# Altium PCB Methane Sensor PCB.PcbDoc
Units mil, origin at the board's own origin, x right, y up, seen from the top; angles counter-clockwise.
Board outline 2570 x 1825 mil, 2 copper layers (Top Layer, Bottom Layer); 14 components, 11 nets, 65 pads, 7 vias.
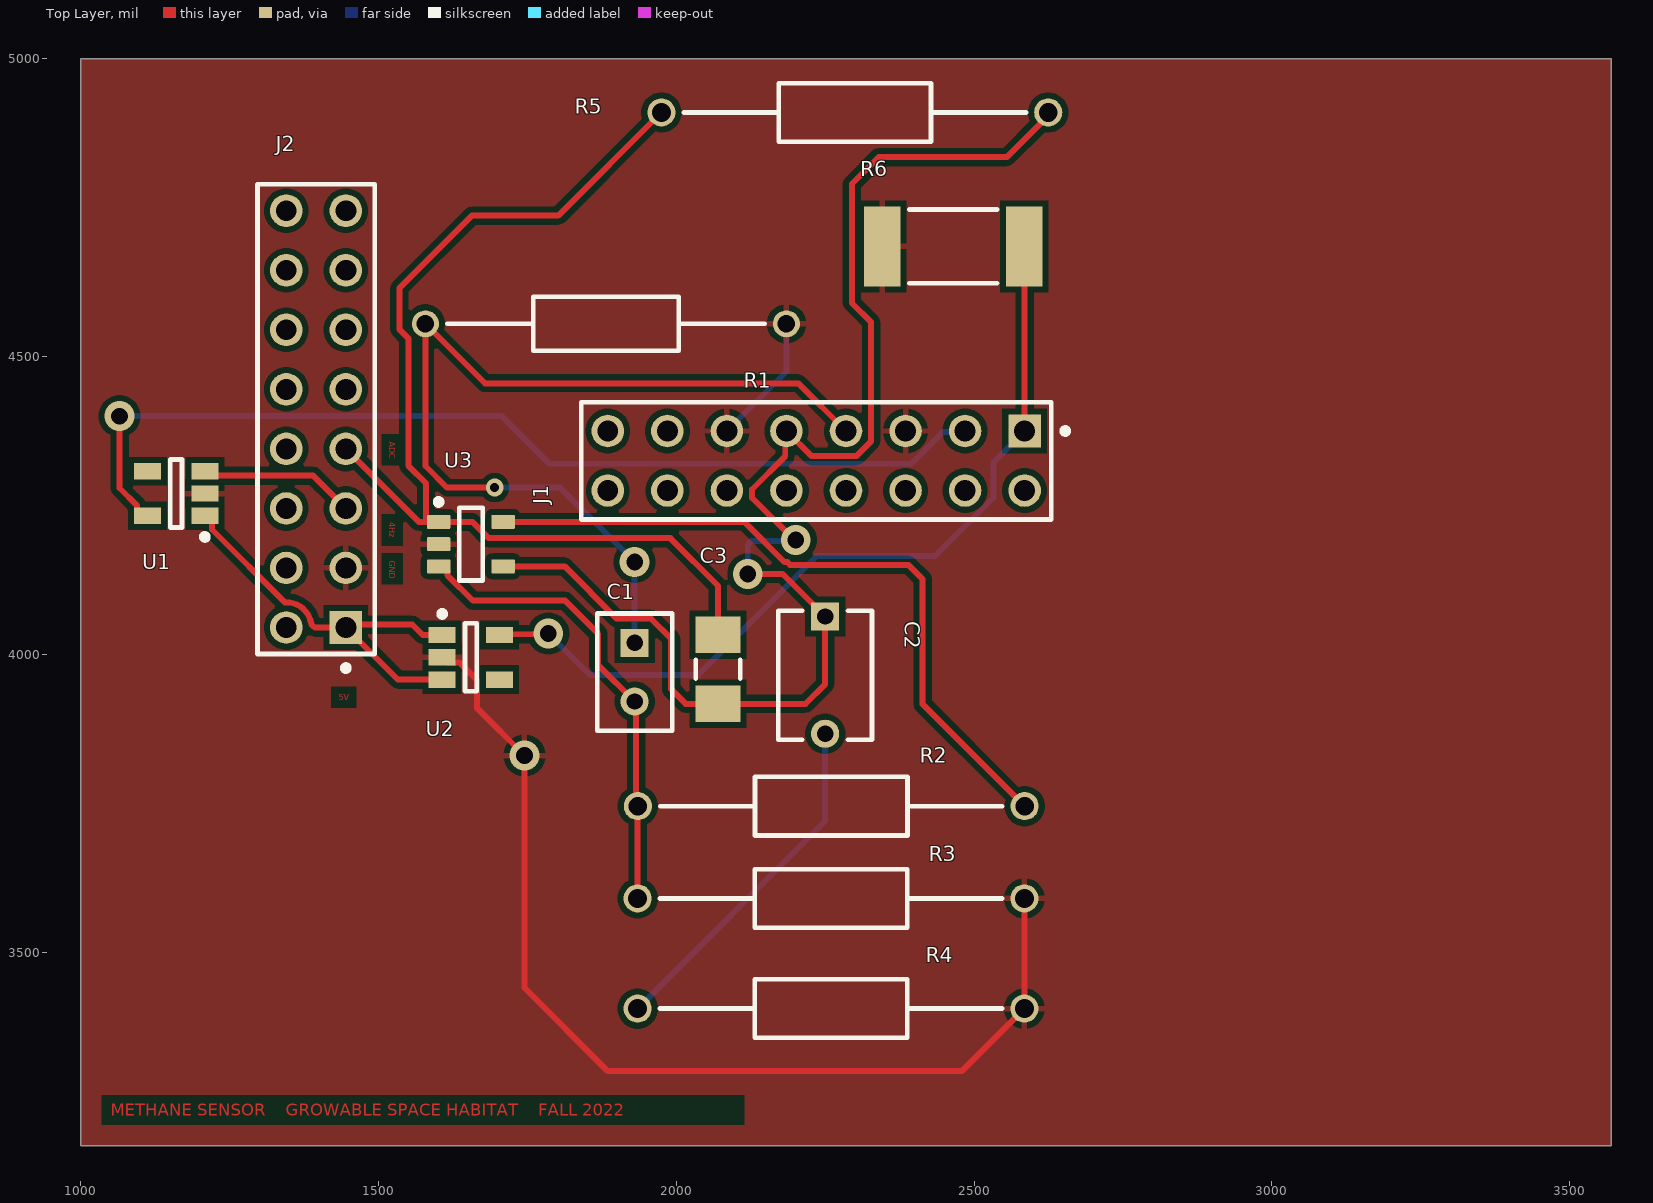
[diagram p0: Top Layer view]
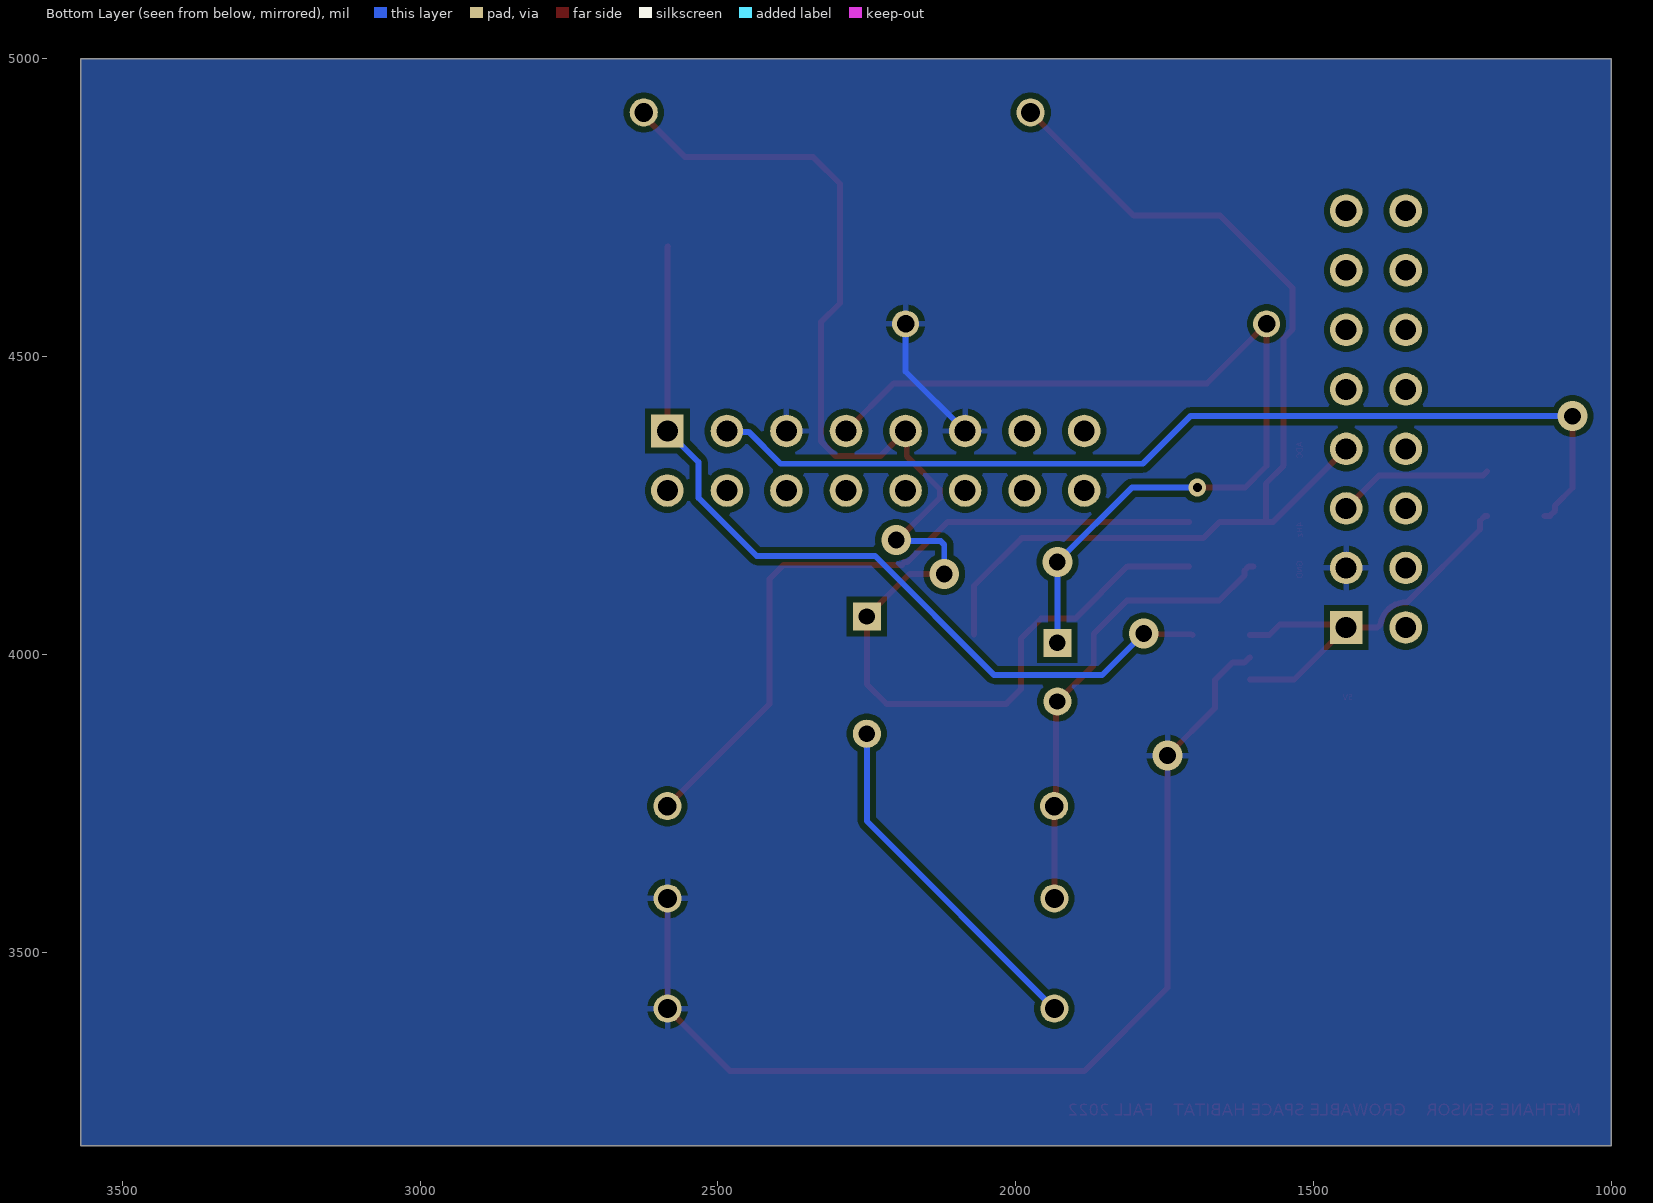
[diagram p1: Bottom Layer view, seen from below]
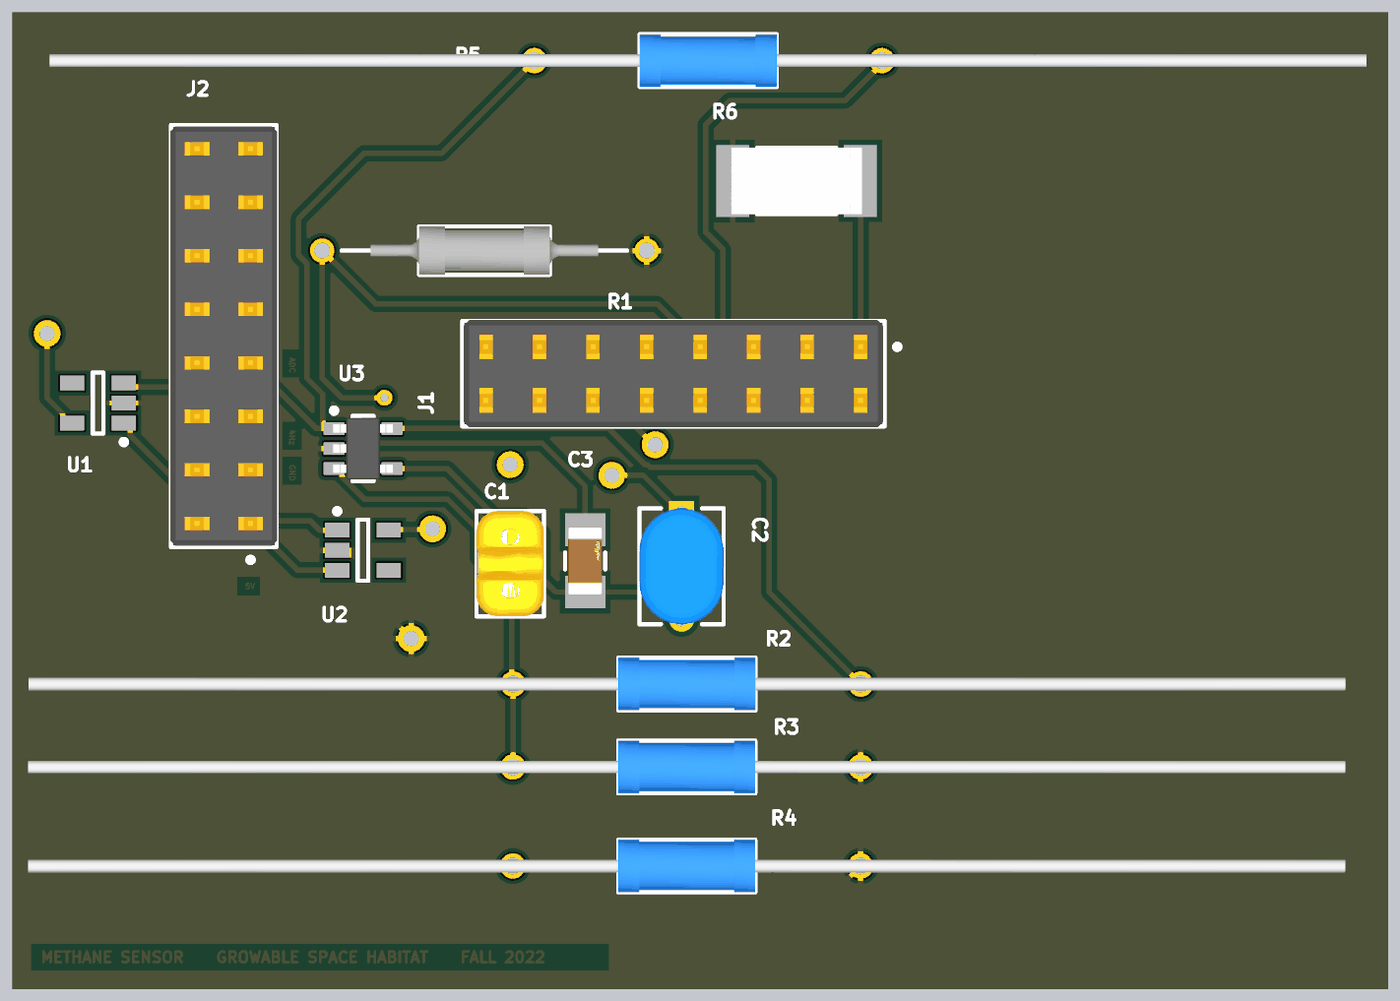
[diagram p2: 3D render of the assembled board from above, using the file's embedded part models]

## Layer stack, top to bottom
Top Solder: solder mask 0.4, Solder Resist, Dk 3.5
Top Layer: signal copper 1.4
Dielectric 1: dielectric 12.6, FR-4, Dk 4.8
Bottom Layer: signal copper 1.4
Bottom Solder: solder mask 0.4, Solder Resist, Dk 3.5

## Board outline
1000,5000 3570,5000 3570,3175 1000,3175

## Design rules (kind name [scope] priority, off if disabled: settings)
Clearance [All] p1: gap=9.84 ignorepadtopadclearanceinfootprint=FALSE
MinimumSolderMaskSliver [All] p1: minsoldermaskwidth=1.84
PolygonConnect [All] p1: connectstyle=Relief reliefconductorwidth=10 reliefentries=4 polygonreliefangle="90 Angle" airgapwidth=10
RoutingVias [All] p1: holewidth=28 width=50 viastyle="Through Hole" minholewidth=28 minwidth=50 maxholewidth=28 maxwidth=50
SilkToSolderMaskClearance [IsPad] p1: minsilkscreentomaskgap=7.8 clearancetoexposedcopper=TRUE
SolderMaskExpansion [All] p1: expansion=4 istentingtop=FALSE
Width [All] p1: maxlimit=10 minlimit=10 preferedwidth=10
28 further rules are at their usual default settings.

## Components (designator, comment, footprint, x,y, rotation, side; value= is the part's Value field where it differs from the comment)
C1 "K105Z20Y5VF5TL2" FP-K105Z20Y5VF5TL2-MFG 1930,3970 r270 top value=1uF
C2 "RCER71E106K3M1H03A" FP-RCE3M1-MFG 2250,3965 r270 top
C3 "GRM31C5C1H823JA01L" FP-GRM31C-0_2-e0_3_0_8-IPC_A 2070,3975 r90 top
J1 "87227-8" FP-87227-8-MFG 2235,4325 r180 top
J2 "87227-8" FP-87227-8-MFG 1395,4395 r90 top
R1 "LR1F47K" RESAD1540W55L620D230 2185,4555 r180 top
R2 "MRS25000C8203FCT00" RESAD1650W60L650D250 1935.39,3745 r0 top
R3 "MRS25000C8203FCT00" RESAD1650W60L650D250 2584.61,3590 r180 top
R4 "MBB02070C6801FRP00" RESAD1650W60L650D250 2584.61,3405 r180 top
R5 "MRS25000C3603FCT00" RESAD1650W60L650D250 2624.61,4910 r180 top
R6 "CRCW251247K0JNEG" FP-CRCW2512-e3-IPC_A 2465,4685 r180 top
U1 "" ADI-UJ-5_M 1160,4270 r180 top
U2 "" ADI-UJ-5_M 1655,3995 r0 top
U3 "OPA735AIDBVR" DBV0005A_N 1655,4185 r0 top

## Footprints (in the part's own frame and the unit in brackets; to place one, negate y for a bottom-side part, rotate by r counter-clockwise, add the part's x,y. Pads: shape width x height; smd on the part's side, far side on the other; paste and mask are expansions set on the pad)
ADI-UJ-5_M [mm] "SOT23, 5-Leads, Body 2.9x1.6mm, Pitch 0.95mm, IPC Low Density"
  rect 1.15x0.7 smd: 1(-1.225,0.95) 2(-1.225,0) 3(-1.225,-0.95) 4(1.225,-0.95) 5(1.225,0.95)
  silkscreen extent -1.35,-1.45 0.25,1.97, body extent -0.8,-1.45 0.8,1.45, height 1
DBV0005A_N [mm] "SOT23, 5-Leads, Body 3.05x1.75mm, Pitch 0.95mm, IPC Medium Density"
  rrect17% 1x0.6 smd: 1(-1.375,0.95) 2(-1.375,0) 3(-1.375,-0.95) 4(1.375,-0.95) 5(1.375,0.95)
  silkscreen extent -1.5,-1.55 0.5,1.92, body extent -1.42,-1.46 1.42,1.46, height 1.08
FP-87227-8-MFG [mil]
  rect 54.69x54.69 hole 35 paste-39370.1 mask+0: 1(-350,-50)
  round 54.69 hole 35 paste-39370.1 mask+0: 2(-350,50) 3(-250,-50) 4(-250,50) 5(-150,-50) 6(-150,50) 7(-50,-50) 8(-50,50) 9(50,-50) 10(50,50) 11(150,-50) 12(150,50) 13(250,-50) 14(250,50) 15(350,-50) 16(350,50)
  silkscreen extent -423,-99 394,99, body extent -398,-102 398,102, height 10
FP-CRCW2512-e3-IPC_A [mil]
  rect 61.22x134.18 smd paste+0 mask+0: 1(-119.12,0) 2(119.12,0)
  silkscreen extent -74,-62 74,62, body extent -169,-87 169,87, height 10
FP-GRM31C-0_2-e0_3_0_8-IPC_A [mil]
  rect 61.21x75.05 smd paste+0 mask+0: 1(-58.1,0) 2(58.1,0)
  silkscreen extent -16,-38 16,38, body extent -108,-57 108,57, height 10
FP-K105Z20Y5VF5TL2-MFG [mm]
  rect 1.2x1.2 hole 0.7 paste-1000 mask+0: 1(-1.25,0)
  round 1.2 hole 0.7 paste-1000 mask+0: 2(1.25,0)
  silkscreen extent -2.5,-1.6 2.5,1.6, body extent -2.6,-1.7 2.6,1.7, height 0.25
FP-RCE3M1-MFG [mm]
  rect 1.2x1.2 hole 0.7 paste-1000 mask+0: 1(-2.5,0)
  round 1.2 hole 0.7 paste-1000 mask+0: 2(2.5,0)
  silkscreen extent -2.75,-2 2.75,2, body extent -3.2,-2.1 3.2,2.1, height 0.25
RESAD1540W55L620D230 [mm]
  round 1.15 hole 0.75: 1(0,0) 2(15.4,0)
  silkscreen extent 0.92,-1.15 14.48,1.15, body extent 2.3,-1.15 13.1,1.15, height 2.3
RESAD1650W60L650D250 [mm]
  round 1.2 hole 0.8: 1(0,0) 2(16.5,0)
  silkscreen extent 0.95,-1.25 15.55,1.25, body extent -23,-1.25 39.5,1.25, height 2.5

## Part data
C1: library part CMP-02417-000003-1, "CAP CER 1UF 50V Y5V RADIAL", Capacitance=1uF, Manufacturer="Vishay BC Components", Temperature="-30°C to +85°C", Temperature Characteristic=Y5V, Temperature Range High=+85°C, Temperature Range Low=-30°C, Tolerance=-20+80%, Voltage Rating=50V, Automotive=No, Category=Cap, ComponentLink2Description=Datasheet, ComponentLink2URL=https://www.vishay.com/docs/45171/kseries.pdf, Device Class L1="Passive Components", Device Class L2=Capacitors, Device Class L3="Ceramic Capacitors", Digikey Description="CAP CER 1UF 50V Y5V RADIAL", Height=6.6mm, Lead Free=Yes, Manufacturer Part Number=K105Z20Y5VF5TL2, Material=Ceramic, Mouser Description="Multilayer Ceramic Capacitors MLCC - Leaded 1uF 50volts +80/-20% Y5V 2.5mm LS", Octopart=https://octopart.com/k105z20y5vf5tl2-vishay-39475252, Package=K105Z20Y5VF5TL2, RoHS=TRUE
C2: library part CMP-06035-005744-1, "Cap Ceramic 10uF 25V X7R ±10% Radial 5mm +125°C Automotive Ammo Pack", Capacitance=10uF, Case/Package=Radial, Dielectric=X7R, Max Operating Temperature=125°C, Min Operating Temperature=-55°C, Package Quantity=1500, Ratings=AEC-Q200, Resistor Type=Ceramic, Tolerance=10%, Voltage Rating=25V, Height=5mm, Height - Seated (Max)=0.197inch, Lead Diameter=0.5mm, Lead Pitch=0.197inch, Lead/Base Style="Formed Leads", Length=0.217inch, Mount="Through Hole", Packaging="Tape and Reel", Termination=Radial, Voltage Rating (DC)=25V, Width=0.157inch
C3: library part CMP-06035-048477-1, "Chip Multilayer Ceramic Capacitors for General Purpose, 1206, 82000pF, C0G, 30ppm/°C, 5%, 50V", Capacitance=82nF, Case Code (Imperial)=1206, Case Code (Metric)=3216, Dielectric=C0G, Max Operating Temperature=125°C, Min Operating Temperature=-55°C, Package Quantity=1, Tolerance=5%, Voltage=50V, Case/Package=1206, Depth=1.6mm, Height=1.6mm, Lead Free="Lead Free", Length=3.2mm, Mount="Surface Mount", Packaging="Tape and Reel", Radiation Hardening=No, Termination=SMD/SMT, Thickness=0.071inch, Voltage Rating=50V, Voltage Rating (DC)=50V, Width=0.063inch
J1 J2: library part CMP-03369-000064-1, "CONN HEADER VERT 16POS 2.54MM", Current Rating=3A, Manufacturer="TE Connectivity", Package=0, Temperature="-65°C to +105°C", Temperature Range High=+105°C, Temperature Range Low=-65°C, Automotive=No, Category=Conn, ComponentLink2Description=Datasheet, ComponentLink2URL=https://www.te.com/usa-en/product-87227-8.datasheet.pdf, Conn Gender=Male, Conn Orientation=Straight, Contact Material=Gold,Nickel, Device Class L1=Connectors, Device Class L2="Headers and Wire Housings", Device Class L3=unset, Digikey Description="CONN HEADER VERT 16POS 2.54MM", Footprint Url=https://www.te.com/commerce/DocumentDelivery/DDEController?Action=showdoc&DocId=Customer+Drawing%7F87227%7FH4%7Fpdf%7FEnglish%7FENG_CD_87227_H4.pdf%7F87227-8, Height=0.428inch, Lead Free=Yes, Manufacturer Part Number=87227-8, Mouser Description="Headers & Wire Housings UNSHRD VERT DUAL 16", Number Of Contacts=16, Number Of Rows=2, Octopart=https://octopart.com/87227-8-te+connectivity-39407754, Pitch=2.54mm, RoHS=TRUE
R1: "Resistor", Manufacturer_Name="TE Connectivity", Mouser Part Number=279-LR1F47K, Arrow Part Number=LR1F47K, Arrow Price/Stock=https://www.arrow.com/en/products/lr1f47k/te-connectivity, Datasheet Link=https://componentsearchengine.com/Datasheets/2/LR1F47K.pdf, Manufacturer_Part_Number=LR1F47K, Mouser Price/Stock=https://www.mouser.co.uk/ProductDetail/TE-Connectivity-Holsworthy/LR1F47K?qs=ip69W3eHERWQ8q3y81tH5w%3D%3D
R2 R3: "Resistor", Manufacturer_Name=Vishay, Datasheet Link=http://www.vishay.com/docs/28724/mrs16m25.pdf, Manufacturer_Part_Number=MRS25000C8203FCT00
R4: "Resistor", Manufacturer_Name=Vishay, Mouser Part Number=594-MBB02070C6801FRP, Datasheet Link=https://componentsearchengine.com/Datasheets/1/MBB02070C6801FRP00.pdf, Manufacturer_Part_Number=MBB02070C6801FRP00, Mouser Price/Stock=https://www.mouser.co.uk/ProductDetail/Vishay-Beyschlag/MBB02070C6801FRP00?qs=LkqrmUh5PIIetlOD9qrCQg%3D%3D
R5: "Resistor", Manufacturer_Name=Vishay, Mouser Part Number=N/A, Datasheet Link=http://www.vishay.com/docs/28724/mrs16m25.pdf, Manufacturer_Part_Number=MRS25000C3603FCT00, Mouser Price/Stock=http://www.mouser.com/Search/ProductDetail.aspx?qs=vcbl%252bK4rRlcCDVZNdOBzYg%3d%3d
R6: library part CMP-1018-00114-2, "RES Thick Film, 47kΩ, 5%, 1W, 200ppm/°C, 2512", Case Code (Imperial)=2512, Case Code (Metric)=6432, Max Operating Temperature=155°C, Max Power Dissipation=1W, Min Operating Temperature=-55°C, Package Quantity=1, Resistance=47kR, Temperature Coefficient=200ppm/°C, Tolerance=5%, Voltage Rating=500V, Case/Package=2512, Composition="Thick Film", Contact Plating=Tin, Depth=3.15mm, Features="Automotive AEC-Q200", Height=0.6mm, Lead Free="Lead Free", Length=6.3mm, Military Standard=Not, Number of Terminations=2, Packaging="Tape and Reel", Power Rating=1W, Termination=SMD/SMT, Voltage Rating (DC)=500V, Weight=0.001429oz, Width=3.15mm
U1 U2: library part CMP-0786-00350-1, "300 mA, Low Quiescent Current, CMOS Linear Regulator, 2.3 to 5.5 V Vin, 3 V Vout, Industrial, 5-pin SOT23 (UJ-5), Reel", Manufacturer="Analog Devices", PartNumber=ADP122AUJZ-3.0-R7, Preset Vout Values (V)=3.0, Supply Current IGND @ Small Load=45uA, Code_JEDEC=MO-193-AB, ComponentLink1Description="Manufacturer URL", ComponentLink1URL=http://www.analog.com/en/index.html, ComponentLink2Description=Datasheet, ComponentLink2URL=http://www.analog.com/static/imported-files/data_sheets/ADP122_123.pdf, ComponentLink3Description="Package Specification", ComponentLink3URL=http:/www.analog.com/static/imported-files/packages/PKG_PDF/TSOT(UJ)/UJ_5.pdf, ComponentLink4Description="URL Link1", ComponentLink4URL="Product URL:http://www.analog.com/en/ADP122/productSearch.html", DatasheetVersion="Rev. E", Iout max=300mA, Mounting Technology="Surface Mount", PackageDescription="5-Pin Thin Small Outline Transistor Package, Body 2.9 x 1.6 mm, Pitch 0.95 mm", PackageReference=UJ-5, PackageVersion="100708-A, 10/2008", Packing=Reel, Vin (max) (V)=5.5, Vin (min) (V)=2.3
U3: library part CMP-0272-02194-3, "0.05 uV/degC (Max), Single-Supply CMOS Zero-Drift Series Operational Amplifier, 2.7 to 12 V, -40 to 85 degC, 5-pin SOT23 (DBV5), Green (RoHS & no Sb/Br)", Manufacturer="Texas Instruments", Rating=Catalog, Total Supply Voltage(Max)(+5V is 5, +/-5V is 10)=12, Total Supply Voltage(Min)(+5V is 5, +/-5V is 10)=2.7, CMRR(Min)(dB)=115, Code_JEDEC=MO-178, ComponentLink1Description="Manufacturer URL", ComponentLink1URL=http://www.ti.com/, ComponentLink2Description=Datasheet, ComponentLink2URL=http://www.ti.com/lit/ds/symlink/opa735.pdf, ComponentLink3Description="Package Specification", ComponentLink3URL=http://www.ti.com/litv/pdf/mpds018i, DatasheetVersion=SBOS282B, Eco-Plan="Green (RoHS & no Sb/Br)", GBW(Typ)(MHz)=1.6, IIB(Max)(pA)=200, Iq per channel(Max)(mA)=0.75, Mounting Technology="Surface Mount", Number of Channels=1, Offset Drift(Typ)(uV/C)=0.01, PackageDescription="5-Pin Plastic Small Outline, Body 1.6 x 2.9 mm, Pitch 0.95 mm", PackageReference=DBV0005A, PackageVersion="4073253-4/K, 03/2006", Packing="LARGE T&R", PartNumber=OPA735AIDBVR, Slew Rate(Typ)(V/us)=1.5, Sub Family="Low Offset Voltage Amplifier (<=500uV), Low Supply Voltage Amplifier (<=2.7V), Precision Amplifier, Zero Drift Precision Amplifier", Vio (25C)(Max)(mV)=0.005

## Via types
v1: diameter 50, hole 28, Top Layer to Bottom Layer, 6 vias
v2: diameter 30, hole 15, Top Layer to Bottom Layer, 1 vias

## Nets (pads, with @x,y where several pads share a name; then routed paths per layer and width w, separated by ;. In a path a pad name is that pad's centre, name@x,y a point inside that pad or via, vN(x,y) a via of type N, cw(c..) or ccw(c..) an arc to the next point about the centre after c; other vN are vias at no path point)
3V: R2.2 U3.5 | length 1196.6
  Top Layer w10: U3.5 2114.13,4222.4 2181.69,4154.84 2186.64,4154.84 2191.33,4150.16 2389.84,4150.16 2413.85,4126.15 2413.85,3916.15 R2.2
"4 Hz": J2.5 U1.3 | length 262.6
  Top Layer w10: U1.3 1215.63,4300 1390,4300 J2.5
5V: J2.1 U1.1 U2.1 U2.3 | length 695.3
  Top Layer w10: U1.1 1211.54,4232.6 1220.32,4223.82 1220.32,4209.68 1342.69,4087.31 1343.35,4087.31 cw(c1345,4045) 1386.57,4053.03 ccw(c1396.38,4055) 1390.61,4046.83 1393.2,4045 1396.38,4045 J2.1 ; U2.3 1532.4,3957.6 J2.1 ; U2.1 1574.17,4032.4 1556.57,4050 1450,4050 J2.1
+V: J1.1 R6.1 U2.5 | length 1427.1
  Top Layer w10: U2.5 1704.53,4033.7 1783.7,4033.7 v1(1785,4035) ; R6.1 2585,4684.12 J1.1
  Bottom Layer w10: v1(1785,4035) 1855,3965 2036.03,3965 2236.03,4165 2434.88,4165 2532.6,4262.72 2532.6,4322.6 J1.1
"Active Detector Output": C1.1 J1.7 R1.2 | length 1573.5
  Top Layer w10: v2(1695,4280) 1615,4280 1578.7,4316.3 R1.2 1678.7,4455 2205,4455 J1.7
  Bottom Layer w10: v2(1695,4280) 1805,4280 v1(1930,4155) C1.1
ADC: C3.2 J2.7 R5.2 U3.1 | length 1775.6
  Top Layer w10: J2.7 1567.6,4222.4 1580,4222.4 ; R5.2 1801.7,4736.7 1656.7,4736.7 1535,4615 1535,4545.7 1550,4530.7 1550,4316.94 1580,4286.94 1580,4222.4 ; C3.2 2070,4115 1990,4195 1685,4195 1657.6,4222.4 U3.1 1580,4222.4
GND: J1.5 J1.11 J2.3 R1.1 R3.1 R4.1 R6.2 U1.2 U2.2 U3.2 | length 1971.6
  Top Layer w10: U2.2 1615.39,3986.38 1635.62,3986.38 1665.59,3956.41 1665.59,3909.41 v1(1745,3830) 1745,3440 1885,3300 2479.61,3300 R4.1 R3.1
  Bottom Layer w10: J1.11 2185,4475 R1.1
"IR Source": J1.3 U1.5 | length 1667.9
  Top Layer w10: v1(1065,4400) 1065,4279.37 1094.13,4250.24 1094.13,4241.38 1102.91,4232.6 U1.5
  Bottom Layer w10: v1(1065,4400) 1706.57,4400 1786.57,4320 2395,4320 2448.52,4373.52 2483.52,4373.52 J1.3
NetC1_2: C1.2 R2.1 R3.2 U3.3 | length 791.6
  Top Layer w10: U3.3 1608.74,4147.6 1615.55,4140.79 1615.55,4132.91 1658.46,4090 1813.25,4090 1868.94,4034.31 1868.94,3981.85 C1.2 1932.7,3918.09 1932.7,3747.7 R2.1 1935.2,3744.8 1935.2,3590.2 R3.2
NetC2_2: C2.2 R4.2 | length 592.1
  Bottom Layer w10: R4.2 2250,3720 C2.2
"Reference Detector Output": C2.1 C3.1 J1.9 R5.1 U3.4 | length 2343.3
  Top Layer w10: U3.4 1812.4,4147.6 1900,4060 1957.45,4060 1991.22,4026.22 1991.22,3941.37 2015.69,3916.9 C3.1 2216.9,3916.9 2250,3950 C2.1 2178.43,4135 v1(2120,4135) ; v1(2200.79,4192.09) 2197.91,4192.09 2127.18,4262.82 2127.18,4276.84 2183,4332.66 2183,4373 J1.9 2227.18,4332.82 2302.47,4332.82 2327.18,4357.53 2327.18,4557.67 2295,4589.86 2295,4790 2340,4835 2555,4835 2624.61,4904.61 R5.1
  Bottom Layer w10: v1(2120,4135) 2120,4184.14 2125.86,4190 2198.71,4190 v1(2200.79,4192.09)
pads on no net: J1.2 J1.4 J1.6 J1.8 J1.10 J1.12 J1.13 J1.14 J1.15 J1.16 J2.2 J2.4 J2.6 J2.8 J2.9 J2.10 J2.11 J2.12 J2.13 J2.14 J2.15 J2.16 U1.4 U2.4

## Polygon pours and split planes (outlines as drawn)
GND on Top Layer "1-GND" (solid, pour order 0): 1000,5000 3570,5000 3570,3175 1000,3175
GND on Bottom Layer "2-GND" (solid, pour order 1): 1000,5000 3570,5000 3570,3175 1000,3175

## Other copper
Top Layer:
  text "ADC" at 1518,4357 h10 r270
  text "4Hz" at 1518,4222 h10 r270
  text "GND" at 1518,4157 h10 r270
  text "5V" at 1433,3923 h10
  text "METHANE SENSOR    GROWABLE SPACE HABITAT    FALL 2022" at 1050,3225 h20